# EAGLE board Seeed Studio XIAO nRF52840 v1.1 (EAGLE 9.6.2)
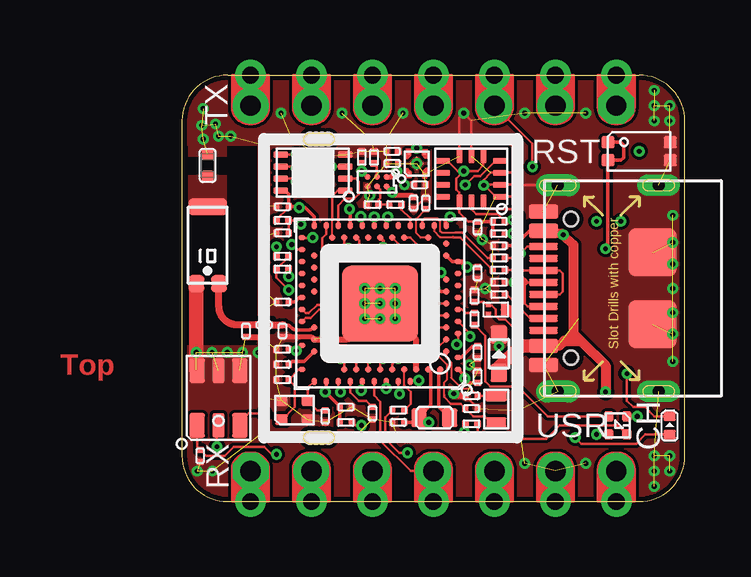
[diagram p0: board, top side]
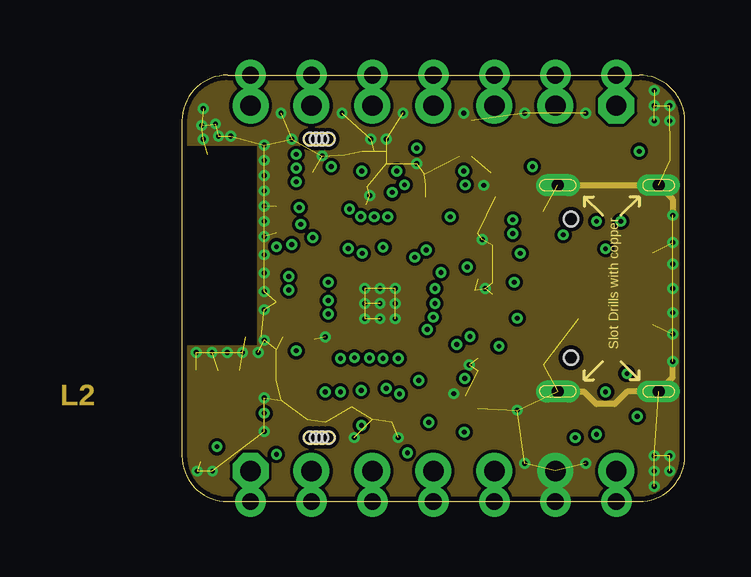
[diagram p1: board, inner layer Route2]
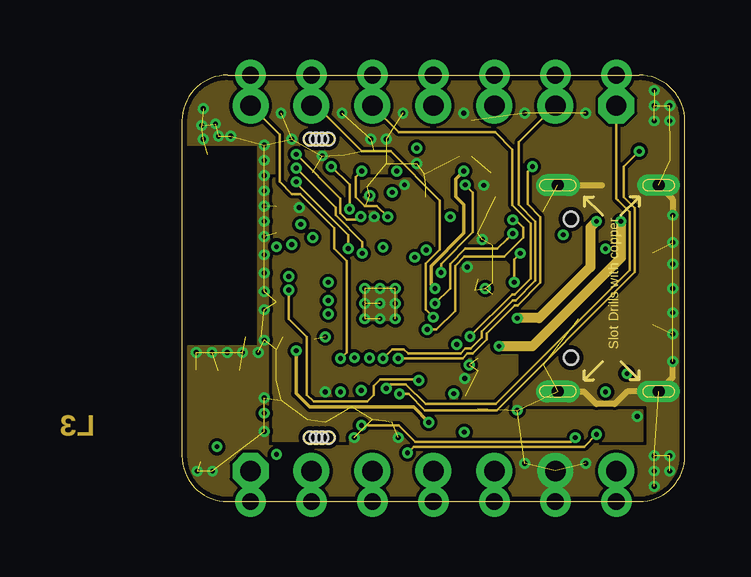
[diagram p2: board, inner layer Route15]
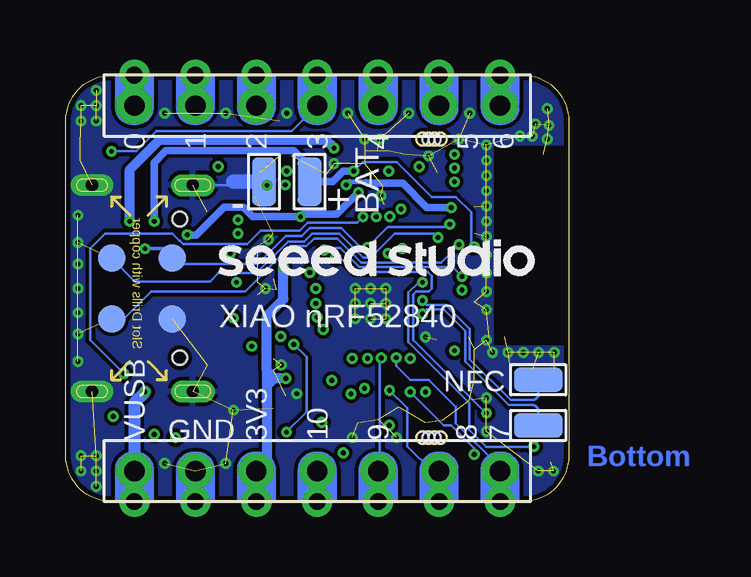
[diagram p3: board, bottom side, seen from below]

Size 20.95 x 17.78 mm. Coordinates in mm from the lower left corner, seen from the top.
Outline: 20.95,1.91 20.95,15.88 arc90 19.05,17.78 1.9,17.78 arc90 0,15.88 0,1.91 arc90 1.9,0 19.05,0 arc90 20.95,1.91
Outline: 5.33,2.92 6.1,2.92 arc-90 6.35,2.67 arc-90 6.1,2.41 5.33,2.41 arc-90 5.08,2.67 arc-90 5.33,2.92
Outline: 5.33,15.37 6.1,15.37 arc-90 6.35,15.11 arc-90 6.1,14.86 5.33,14.86 arc-90 5.08,15.11 arc-90 5.33,15.37
Copper layers (1+2*15+16): Top 0.035mm / dielectric 0.2mm / Route2 0.0175mm / dielectric 0.7mm / Route15 0.0175mm / dielectric 0.2mm / Bottom 0.035mm
Design rules "SeeedStudio_2layer_DRU_no_angle_20140221 *": minimum track width 3.5mil, minimum drill 0.2mm, track to track 3.5mil, track to pad 3.5mil, pad to pad 3.5mil, via to via 3.5mil, smd to smd 0mil, copper to edge 8mil, drill to drill 8mil, minimum pad ring 0.125mm, minimum via ring 0.125mm, stop-mask expansion 1mil, vias tented up to drill 25mil, thermal gap 6mil
Net classes: 0 default: width 0.089 mm, drill 0.2 mm, clearance 0.102 mm
Holes 0.51 mm at 5.33,2.67 6.1,2.67 5.33,15.11 6.1,15.11 5.59,2.67 5.84,2.67 5.59,15.11 5.84,15.11
tRestrict: area 3.1,7.1 to 3.8,7.6; area 5.1,5.1 to 11.4,11.4; area 10.5,12.2 to 13.6,14.7; area 14.5,6.1 to 16,6.2; area 14.5,11.6 to 16,11.7; area 6.5,14.1 to 7.1,14.2
bRestrict: area 23.9,7.9 to 26.9,10.4

## Footprints (pad centres in the part's own frame; a part is rotated, then mirrored left to right if it is on the bottom)
ANT-SMD3P-3.2X1.6X1.04MM = smd 0.65 x 0.7: 1 -0.47,1.6; 2 0.47,1.6 | smd 1.6 x 0.7: 3 0,-1.6
TP-80X40MIL = smd 2.032 x 1.016: 1 0,0
C0201 = smd 0.279 x 0.318: 1 -0.254,0; 2 0.254,0
C0402 = smd 0.445 x 0.508: 1 -0.445,0; 2 0.445,0
L0201 = smd 0.279 x 0.318: 1 -0.254,0; 2 0.254,0
LED-0402 = smd 0.385 x 0.508: + -0.383,0; - 0.383,0
SOD-523 = smd 0.762 x 0.7: + 0.8,0; - -0.8,0
H7-HALF-HOLE-2.54 = drill 0.85 pad 1.5 octagon: 1 0,7.62 | drill 0.85 pad 1.5: 2 0,5.08; 3 0,2.54; 4 0,0; 5 0,-2.54; 6 0,-5.08; 7 0,-7.62 | drill 0.7 pad 1.27: 13 -1.27,7.62; 14 -1.27,5.08; 15 -1.27,2.54; 16 -1.27,0; 17 -1.27,-2.54; 18 -1.27,-5.08; 19 -1.27,-7.62
SW4-SMD-2.8-2.6X1.6X0.53MM = smd 0.55 x 0.5: 1 -1.3,0.375; 2 1.3,0.375; 3 -1.3,-0.375; 4 1.3,-0.375
L0603 = smd 0.635 x 0.762: 1 -0.635,0; 2 0.635,0
MIC6P-3.5X2.65X0.94MM = smd 0.635 x 1.016: 1 0.889,1.143; 3 -0.889,1.143; 4 -0.889,-1.143; 6 0.889,-1.143 | smd 0.508 x 1.016: 2 0,1.143; 5 0,-1.143
PMOS_1.0*0.6*0.35MM = smd 0.5 x 0.25: 1 0,0.325 | smd 0.15 x 0.25: 2 -0.175,-0.325; 3 0.175,-0.325
R0201 = smd 0.279 x 0.318: 1 -0.254,0; 2 0.254,0
4P1010 = smd 0.4 x 0.4: + 0.375,0.375; B- -0.375,0.375; G- -0.375,-0.375; R- 0.375,-0.375
TP-D45MIL = smd 1.143 x 1.143: T 0,0
AQFN50P700X700X85_HS-74N = smd 0.225 x 0.3: A8 -1.25,3.25; A10 -0.75,3.25; A12 -0.25,3.25; A14 0.25,3.25; A16 0.75,3.25; A18 1.25,3.25; A20 1.75,3.25; A22 2.25,3.25; A23 2.75,3.25; AD2 -2.75,-3.25; AD4 -2.25,-3.25; AD6 -1.75,-3.25; AD8 -1.25,-3.25; AD10 -0.75,-3.25; AD12 -0.25,-3.25; AD14 0.25,-3.25; AD16 0.75,-3.25; AD18 1.25,-3.25; AD20 1.75,-3.25; AD22 2.25,-3.25; AD23 2.75,-3.25 | smd 0.3 x 0.225: AA24 3.25,-2.25; AC24 3.25,-2.75; B1 -3.25,2.75; B24 3.25,2.75; C1 -3.25,2.25; E24 3.25,1.75; G1 -3.25,1.25; J1 -3.25,0.75; J24 3.25,0.75; L1 -3.25,0.25; L24 3.25,0.25; N1 -3.25,-0.25; N24 3.25,-0.25; R1 -3.25,-0.75; R24 3.25,-0.75; U1 -3.25,-1.25; U24 3.25,-1.25; W1 -3.25,-1.75; W24 3.25,-1.75 | smd 0.275 x 0.275: AB2 -2.75,-2.5; AC5 -2,-2.75; AC9 -1,-2.75; AC11 -0.5,-2.75; AC13 0,-2.75; AC15 0.5,-2.75; AC17 1,-2.75; AC19 1.5,-2.75; AC21 2,-2.75; B3 -2.5,2.75; B5 -2,2.75; B7 -1.5,2.75; B9 -1,2.75; B11 -0.5,2.75; B13 0,2.75; B15 0.5,2.75; B17 1,2.75; B19 1.5,2.75; D2 -2.75,2; D23 2.75,2; F2 -2.75,1.5; F23 2.75,1.5; H2 -2.75,1; H23 2.75,1; K2 -2.75,0.5; M2 -2.75,0; P2 -2.75,-0.5; P23 2.75,-0.5; T2 -2.75,-1; T23 2.75,-1; V23 2.75,-1.5; Y2 -2.75,-2; Y23 2.75,-2 | smd 3.175 x 3.175: G74 0,0
BQ25101_DSBGA_6_BQ25101 = smd 0.254 x 0.254: A1 -0.2,0.4; A2 0.2,0.4; B1 -0.2,0; B2 0.2,0; C1 -0.2,-0.4; C2 0.2,-0.4
LGA14-0.5-2.5X3X0.86MM = smd 0.6 x 0.25: 1 -1.2,0.75; 2 -1.2,0.25; 3 -1.2,-0.25; 4 -1.2,-0.75; 8 1.2,-0.75; 9 1.2,-0.25; 10 1.2,0.25; 11 1.2,0.75 | smd 0.25 x 0.6: 5 -0.5,-0.95; 6 0,-0.95; 7 0.5,-0.95; 12 0.5,0.95; 13 0,0.95; 14 -0.5,0.95
X2SON-4 = smd 0.152 x 0.152: 1 -0.445,0.318; 2 -0.445,-0.318; 3 0.445,-0.318; 4 0.445,0.318 | smd 0.45 x 0.45 rotated 45: T 0,0
USON2X3_8 = smd 0.6 x 0.26: 1 -1.35,0.75; 2 -1.35,0.25; 3 -1.35,-0.25; 4 -1.35,-0.75; 5 1.35,-0.75; 6 1.35,-0.25; 7 1.35,0.25; 8 1.35,0.75 | smd 0.35 x 1.6: PAD 0,0
USB2.0-TYPE-C = smd 1.2 x 0.6: A1_B12 0.05,3.2; A4_B9 0.05,2.4; B1_A12 0.05,-3.2; B4_A9 0.05,-2.4 | smd 1.2 x 0.3: A5 0.05,1.25; A6 0.05,0.25; A7 0.05,-0.25; A8 0.05,-1.25; B5 0.05,-1.75; B6 0.05,-0.75; B7 0.05,0.75; B8 0.05,1.75 | drill 0.508 pad 0.889 long: S1 -4.75,4.3; S2 -4.75,-4.3 | drill 0.508 pad 0.914 long: S3 -0.55,4.3; S4 -0.55,-4.3 | smd 2 x 2: S5 -4.5,1.5; S6 -4.5,-1.5 | hole 0.6: -1.1,-2.89; -1.1,2.89
X2-SMD-L1.6X1.0X0.5MM = smd 0.45 x 0.85: 1 -0.55,0 | smd 0.45 x 0.9: 2 0.55,0
4P1612 = smd 0.55 x 0.45: 1 -0.55,-0.4; 2 0.55,-0.4; 3 0.55,0.4; 4 -0.55,0.4

## Placement (x,y rotation side)
ANT1  [ANT-SMD3P-3.2X1.6X1.04MM]  1.07,10.69 180 top
BAT  [TP-80X40MIL]  10.79,13.34 90 bottom
C1  100nF  [C0201]  12.32,11.43 90 top
C2  10pF  [C0201]  12.06,4.41 0 top
C3  2.2uF  [C0201]  9.91,13.21 180 top
C4  2.2uF  [C0201]  8.76,14.61 180 top
C5  100nF  [C0201]  4.19,11.2 180 top
C6  2.2uF  [C0201]  12.32,9.53 90 top
C7  10pF  [C0201]  12.06,3.87 180 top
C8  100nF  [C0201]  0.76,1.91 90 top
C9  2.2uF  [C0201]  13.21,10.67 0 top
C10  1nF  [C0402]  1.07,14.02 90 top
C22  2.2uF  [C0201]  10.16,12.45 270 top
C24  100nF  [C0201]  12.32,6.22 90 top
C25  2.2uF  [C0201]  9.65,12.45 90 top
C29  2.2uF  [C0201]  4.19,12.29 0 top
C30  2.2uF  [C0201]  8.76,14.1 180 top
C31  820pF  [C0201]  4.19,8.32 180 top
C32  15pF  [C0201]  5.97,3.56 270 top
C33  15pF  [C0201]  4.19,5.08 180 top
C34  100nF  [C0201]  4.19,6.35 180 top
C35  100pF  [C0201]  4.19,5.72 180 top
C36  0.8pF  [C0201]  4.19,7.11 90 top
C37  0.5pF  [C0201]  2.67,7.11 90 top
C38  4.7nH  [L0201]  3.43,7.37 180 top
C39  2.2uF  [C0201]  6.83,3.94 0 top
C40  DNP  [C0201]  7.94,3.68 270 top
C41  2.2uF  [C0201]  12.32,5.21 270 top
C42  2.2uF  [C0201]  9.02,3.3 180 top
CHG  RED  [LED-0402]  20.32,3.18 90 top
D1  [SOD-523]  13.21,6.16 270 top
GND  GND  [TP-80X40MIL]  12.7,13.34 270 bottom
J1  DNP  [H7-HALF-HOLE-2.54]  10.48,1.27 90 top
J2  DNP  [H7-HALF-HOLE-2.54]  10.48,16.51 270 top
K1  [SW4-SMD-2.8-2.6X1.6X0.53MM]  19.05,14.61 0 top
L3  10uH  [L0603]  10.52,3.49 180 top
MIC1  MSM261D3526H1CPM  [MIC6P-3.5X2.65X0.94MM]  1.52,4.32 180 top
NFC1  [TP-80X40MIL]  1.27,5.08 0 bottom
NFC2  [TP-80X40MIL]  1.27,3.18 0 bottom
Q1  PMOS_1.00.6*0.35MM  [PMOS_1.0*0.6*0.35MM]  13.08,8 270 top
R1  5.1k  [R0201]  13.21,8.64 180 top
R2  5.1k  [R0201]  13.21,9.14 0 top
R3  2.2k  [R0201]  12.19,7.61 90 top
R4  10k  [R0201]  9.02,3.81 0 top
R5  2.2k  [R0201]  6.83,3.3 0 top
R7  2.2k  [R0201]  12.06,3.24 180 top
R8  DNP  [R0201]  7.49,14.35 90 top
R9  100k  [R0201]  12.19,8.57 270 top
R10  33R  [R0201]  13.21,9.65 180 top
R11  33R  [R0201]  13.21,10.16 180 top
R12  2.7k  [R0201]  8.89,12.38 0 top
R13  10k  [R0201]  4.19,11.72 0 top
R14  10k  [R0201]  13.21,11.68 0 top
R15  10k  [R0201]  13.21,11.18 0 top
R16  1M_1%  [R0201]  4.19,10.22 0 top
R17  510k_1%  [R0201]  4.19,9.69 0 top
R18  2.7k  [R0201]  7.94,12.38 180 top
R20  10k  [R0201]  8,14.35 90 top
RGB6  RGB  [4P1010]  18.16,3.18 0 top
TP1  [TP-D45MIL]  16.51,7.62 0 bottom
TP2  [TP-D45MIL]  16.51,10.16 0 bottom
TP3  [TP-D45MIL]  19.05,7.62 0 bottom
TP5  [TP-D45MIL]  19.05,10.16 0 bottom
U1  [AQFN50P700X700X85_HS-74N]  8.26,8.26 180 top
U2  BQ25100  [BQ25101_DSBGA_6_BQ25101]  8.13,13.34 270 top
U3  LSM6DS3TR-C  [LGA14-0.5-2.5X3X0.86MM]  12.06,13.46 180 top
U6  3.3V  [X2SON-4]  9.78,14.1 90 top
U7  DNP  [USON2X3_8]  5.46,13.72 180 top
U$14  [LOGO-SEEED-NEW-1_3X13MM]  14.61,9.4 0 bottom
USB1  [USB2.0-TYPE-C]  15.11,8.89 180 top
X1  32.768KHz  [X2-SMD-L1.6X1.0X0.5MM]  13.09,3.85 90 top
X2  32MHz  [4P1612]  4.7,3.81 0 top

## Library data of the parts
ANT1 = Antenna_rfeca3216060a1t
BAT D1 GND NFC1 NFC2 X1 = Discrete-new
C1-C10 C22 C24 C25 C29-C42 L3 R1-R5 R7-R18 R20 U6 = GroveX
CHG = Discrete-small
J1 J2 = Connector-new
K1 MIC1 U1 U3 = Making
Q1 = PMOS_1006
RGB6 = LoRaPhone
TP1-TP3 TP5 = Discrete-new; PARTNO: DNP
U2 = Seeed XIAO BLE
U7 = USB2.0-TYPE-C
U$14 = logo
USB1 = USB C
X2 = G2

## Nets
3V3: C3.2 C6.2 C29.2 C39.1 C41.2 J1.5 J1.17 R5.1 R13.1 RGB6.+ U1.A22 U1.AD14 U1.AD23 U1.B1 U1.W1 U1.Y2 U6.1 U7.8
6D_INT1: U1.T2 U3.4
6D_PWR: C1.2 R14.1 R15.1 U1.P2 U3.5 U3.8 U3.12
/CE: R20.1 U2.B1
DEC4-6: C34.1 C42.1 L3.2 U1.B5 U1.E24
GND: ANT1.2 C1.1 C2.1 C3.1 C4.2 C5.2 C6.1 C7.1 C8.1 C9.1 C10.2 C22.1 C24.1 C25.1 C29.1 C30.2 C31.2 C32.2 C33.2 C34.2 C35.2 C36.1 C37.1 C39.2 C40.2 C41.1 C42.2 GND.1 J1.6 J1.18 K1.2 K1.4 MIC1.4 MIC1.5 MIC1.6 R1.2 R2.1 R8.2 R9.1 R18.2 R20.2 TP1.T U1.B7 U1.F23 U1.G74 U2.C2 U3.1 U3.2 U3.3 U3.6 U3.7 U6.2 U6.T U7.4 U7.PAD USB1.A1_B12 USB1.B1_A12 USB1.S1 USB1.S2 USB1.S3 USB1.S4 USB1.S5 USB1.S6 X2.2 X2.4
INTERNAL_I2C_SCL: R14.2 U1.H2 U3.13
INTERNAL_I2C_SDA: R15.2 U1.M2 U3.14
N$1: R1.1 USB1.A5
N$2: R2.2 USB1.B5
N$3: C2.2 U1.D2 X1.2
N$4: C7.2 U1.F2 X1.1
N$5: R7.1 RGB6.R-
N$6: R4.1 RGB6.G-
N$7: R10.2 U1.AD4
N$8: R11.2 U1.AD6
N$9: R3.1 RGB6.B-
N$10: CHG.+ R5.2
N$12: ANT1.3 C10.1
N$20: R12.1 R18.1 U2.B2
N$23: C22.2 U1.AC5
N$24: C24.2 U1.C1
N$25: C31.1 U1.N24
N$26: C33.1 U1.B24 X2.1
N$27: C32.1 U1.A23 X2.3
N$28: C35.1 U1.D23
N$30: C36.2 C38.1 U1.H23
N$31: ANT1.1 C37.2 C38.2
N$32: C40.1 U1.A18
N$35: L3.1 U1.B3
P0.02_AIN0_LOW_A0_D0: J2.1 J2.13 U1.A12
P0.03_AIN1_LOW_A1_D1: J2.2 J2.14 U1.B13
P0.04_AIN2_A4_D4: J2.5 J2.17 U1.J1
P0.05_AIN3_A5_D5: J2.6 J2.18 U1.K2
P0.06_USER_BLUE: R3.2 U1.L1
P0.09/NFC1: NFC1.1 U1.L24
P0.10/NFC2: NFC2.1 U1.J24
P0.13_HICHG: R12.2 U1.AD8
P0.14_!READ_BAT: R17.2 U1.AC9
P0.16_PDM_DATA: MIC1.3 U1.AC11
P0.17_!CHG: CHG.- R8.1 U1.AD12 U2.C1
P0.20_QSPI_SIO_0: U1.AD16 U7.5
P0.21_QSPI_SCK: U1.AC17 U7.6
P0.22_QSPI_SIO_2: U1.AD18 U7.3
P0.23_QSPI_SIO_3: U1.AC19 U7.7
P0.24_QSPI_SIO_1: U1.AD20 U7.2
P0.25_QSPI_CSN: U1.AC21 U7.1
P0.26_USER_RED: R7.2 U1.G1
P0.28_AIN4_LOW_A2_D2: J2.3 J2.15 U1.B11
P0.29_AIN5_LOW_A3_D3: J2.4 J2.16 U1.A10
P0.30_USER_GREEN: R4.2 U1.B9
P0.31_AIN7_BAT: R16.2 R17.1 U1.A8
P1.00_PDM_CLK: MIC1.2 U1.AD22
P1.10_MIC_PWR: C8.2 MIC1.1 U1.A20
P1.11_TX_D6: J2.7 J2.19 U1.B19
P1.12_RX_D7: J1.1 J1.13 U1.B17
P1.13_SCK_D8: J1.2 J1.14 U1.A16
P1.14_MISO_D9: J1.3 J1.15 U1.B15
P1.15_MOSI_D10: J1.4 J1.16 U1.A14
PWR_LED: U1.R24
RESET: C5.1 K1.1 K1.3 R13.2 TP2.T U1.AC13
SWDCLK: TP3.T U1.AA24
SWDIO: TP5.T U1.AC24
USB_D+: R11.1 USB1.A6 USB1.B6
USB_D-: R10.1 USB1.A7 USB1.B7
VBAT: BAT.1 C30.1 Q1.1 R16.1 U2.A1
VBUS: C9.2 C25.2 D1.+ J1.7 J1.19 Q1.2 R9.2 U1.AD2 U2.A2 USB1.A4_B9 USB1.B4_A9
VIN: C4.1 D1.- Q1.3 U6.3 U6.4

## Tracks (layer width: path | path; a pad name or v marks a point on that pad's centre or on a via)
3V3  (via drill 0.2 pad 0.45)
  Top 0.102: RGB6.+ | R13.1 3.94,11.76 4.45,12.27 C29.2
  Top 0.152: U1.A22 6,4.61 v5.97,4.57 6.58,3.96 C39.1 R5.1 | U1.Y2 11.26,10.01 U1.W1 | U1.AD23 5.5,11.89 5.14,12.26 v4.89,12.26 4.85,12.29 C29.2 4.45,12.83 4.31,12.97 U7.8 | U1.AD14 v8.01,11.87 v8.01,11.88 | C41.2 11.96,4.95 v11.79,5.13 11.79,5.22 U1.B1 | RGB6.+ v18.97,3.56
  Top 0.203: C6.2 v11.89,9.78 11.66,10.01 U1.W1
  Route15 0.203: J1.17 J1.5
  Bottom 0.203: v9.27,13.21 9.13,13.34 8.46,13.34 8.38,13.27
  Bottom 0.305: v4.89,12.26 5.91,12.26 6.92,13.27 8.38,13.27
  Bottom 0.406: v11.79,5.13 12.24,5.13 | 12.24,5.13 12.57,5.46 | v11.89,9.78 11.89,8.43 12.57,7.75 12.57,5.46 | 12.57,5.46 12.57,4.83 | 12.24,5.13 12.27,5.13 12.57,4.83 | 12.57,4.83 12.57,1.71 J1.5
  pour Top (isolate 0.127, rank 2, no thermals): 9.4,13.84 9.78,13.46 9.78,13.08 9.72,13.02 9.08,13.02 9.08,13.27 9.33,13.53 9.33,13.84
  pour Route15 (isolate 0.127, no thermals): 3.81,13.46 10.03,13.46 13.97,9.53 13.97,3.81 19.18,3.81 19.18,2.54 3.81,2.54
6D_INT1  (via drill 0.2 pad 0.45)
  Top 0.102: U1.T2 11.01,9.34 v10.79,9.55 | U3.4 13.07,14.21 12.43,13.58 12.18,13.58 v11.81,13.21
  Route15 0.102: v10.79,9.55 10.79,9.91 12.12,11.24 12.12,12.89 v11.81,13.21
6D_PWR  (via drill 0.2 pad 0.45)
  Top 0.102: U3.5 12.56,14.03 12.32,13.78 v11.75,13.78 | C1.2 11.94,11.68 11.56,12.06 U3.12 11.56,12.88 11.43,13.02 11.43,13.46 v11.75,13.78 | U3.8 11.06,14.21 11.49,13.78 v11.75,13.78
  Top 0.152: C1.2 R14.1 R15.1 | U1.P2 10.8,8.76 10.67,8.89 v10.54,8.89
  Route15 0.152: v10.54,8.89 10.39,9.04 10.39,9.83 11.75,11.19 11.75,12.38 11.41,12.72 11.41,13.44 v11.75,13.78
/CE
  Top 0.102: U2.B1 8.13,13.97 R20.1
DEC4-6  (via drill 0.2 pad 0.45)
  Top 0.152: U1.B5 10.37,5.39 10.37,4.02 9.88,3.53 L3.2 | C34.1 4.7,6.35 v4.76,6.29 4.98,6.51 U1.E24 | C42.1 9.69,3.3 L3.2 | v10.29,3.3 10.03,3.3 9.88,3.45 L3.2
  Route15 0.152: v4.76,6.29 4.76,4.51 5.33,3.94 9.65,3.94 v10.29,3.3
GND  (via drill 0.2 pad 0.45)  (118 unrouted)
  Top 0.102: C25.1 C22.1 | C7.1 12.32,3.91 11.82,4.41 C2.1 | U3.7 11.56,16.01 v11.75,16.19 12.06,15.88 U3.6 | USB1.S4 13.99,13.19 13.97,13.21 | 13.97,13.21 U3.2 12.6,13.21 12.59,13.2 | 13.97,13.21 13.97,12.83 13.86,12.71 U3.1 13.08,12.71 12.59,13.2 | 13.97,13.21 | 13.97,13.21 13.97,13.22 13.97,13.59 13.85,13.71 U3.3 12.88,13.72 12.57,13.41 v12.57,13.18 12.59,13.2
  Top 0.203: U1.F23 5.4,6.86 C36.1
  Top 0.254: v3.43,6.73 3.3,6.86 C37.1 | C2.1 11.42,4.41 v11.33,4.5 | U1.F23 6.76,6.76 arc90 v7.62,7.62 | U1.B7 9.76,6.76 U1.G74
  Top 0.61: ANT1.2 0.6,5.49 MIC1.6
  Route2 0.254: USB1.S4 USB1.S2 20.45,12.61 v20.45,11.94 | USB1.S3 16.75,4.59 17.27,4.06 18.03,4.06 18.56,4.59 USB1.S1 20.45,5.17 v20.45,5.84
  Route15 0.203: J1.18 J1.6
  Route15 0.254: USB1.S2 20.45,12.61 v20.45,11.94 | v20.45,5.84 20.45,5.17 USB1.S1 18.56,4.59 18.03,4.06 17.27,4.06 16.75,4.59 USB1.S3 | USB1.S4 17.51,13.19
  Bottom 0.102: USB1.S4 14.12,13.19 13.97,13.34
  Bottom 0.61: 13.97,13.34 GND.1
  other vias: 3.43,14.86 3.43,14.22 3.43,13.59 3.43,12.95 3.43,12.32 3.43,11.68 3.43,11.05 3.43,10.29 3.43,9.53 3.43,8.76 3.43,8 3.17,6.22 9.21,16.19 20.45,10.79 20.45,9.91 20.45,6.99 20.45,7.87 0.63,1.27 20.32,1.27 2.53,6.22 0.6,6.22 19.69,15.88 19.69,16.51 14.29,16.19 16.83,16.19 6.67,16.19 4.13,16.19 14.29,1.59 16.83,1.59 4.57,15.11 3.43,4.32 3.43,2.92 9.78,14.1 12.64,8.89 7.82,12.76 12.51,10.92 5.84,14.41 11.98,5.7 8.26,8.26 7.62,8.26 8.89,8.26 8.89,8.89 8.26,8.89 7.62,8.89 8.26,7.62 8.89,7.62 7.87,15.11 8.51,15.11 20.32,1.91 20.45,8.89 20.32,15.88 13.97,3.81 5.97,6.86 7.18,2.67 9.02,2.67 0.89,15.11 1.52,15.24 2.03,15.24 0.83,15.68 0.89,16.38 1.4,15.75 1.26,6.22 1.89,6.22 1.27,1.27 20.32,16.51 19.69,17.15 19.69,1.27 19.69,1.91 19.69,0.63
  pour Route2 (isolate 0.127, no thermals): 20.95,17.53 20.95,0.25 -1.14,0.25 -1.14,1.68 0,1.68 0,6.48 3.17,6.48 3.17,14.88 0.03,14.88 0.03,17.53
  pour Top (isolate 0.127, rank 6, no thermals): 20.95,17.53 20.95,0.25 -0.56,0.25 -0.56,1.68 0,1.68 0,6.48 3.17,6.48 3.17,14.88 0.03,14.88 0.03,17.53
  pour Bottom (isolate 0.152, rank 6): 20.95,17.53 20.95,0.25 -0.86,0.25 -0.86,1.68 0,1.68 0,6.48 3.17,6.48 3.17,14.88 0.03,14.88 0.03,17.53
  pour Route15 (isolate 0.127, rank 6, no thermals): 20.95,17.53 20.95,0.25 -0.28,0.25 -0.28,1.68 0,1.68 0,6.48 3.17,6.48 3.17,14.88 0.03,14.88 0.03,17.53
  pour Top (no thermals): 0.28,15.32 1.85,15.32 1.85,14.38 0.28,14.38
INTERNAL_I2C_SCL  (via drill 0.2 pad 0.45)
  Top 0.102: v13.78,11.75 13.72,11.68 R14.2 13.15,12 12.26,12 12.06,12.19 U3.13 | v10.22,7.18 10.3,7.26 U1.H2
  Route15 0.102: v13.78,11.75 13.91,11.75 14.22,11.43 14.22,11.01 13.43,10.21 11.77,10.21 11.38,9.82 11.38,7.95 10.6,7.18 v10.22,7.18
INTERNAL_I2C_SDA  (via drill 0.2 pad 0.45)
  Top 0.102: R15.2 v13.78,11.18 14.16,11.56 14.16,11.94 13.9,12.2 12.7,12.2 12.56,12.33 U3.14 | v10.54,8.26 U1.M2
  Route15 0.102: v13.78,11.18 13.56,10.95 13.15,10.54 11.81,10.54 11.18,9.91 11.18,8.89 v10.54,8.26
N$1
  Top 0.102: USB1.A5 14.52,7.64 13.53,8.64 R1.1
N$2  (via drill 0.2 pad 0.45)
  Top 0.102: USB1.B5 14.39,10.64 v14.1,10.35 | R2.2 v13.84,9.14
  Route15 0.102: v13.84,9.14 13.84,10.1 v14.1,10.35
N$3
  Top 0.089: U1.D2 11.01,6.01 11.22,5.8 11.22,5.16 11.66,4.72 12,4.72 C2.2
  Top 0.102: X1.2 12.33,4.4 C2.2
N$4
  Top 0.089: U1.F2 10.67,6.42 10.67,6.1 11.04,5.72 11.04,5.08 10.92,4.96 10.92,4.45
  Top 0.102: X1.1 12.88,3.3 12.62,3.56 12.13,3.56 C7.2 11.61,4.08 11.21,4.08 10.92,4.36 10.92,4.45
N$5
  Top 0.102: R7.1 12.32,2.79 12.51,2.6 15.18,2.6 15.75,3.18 18.16,3.18 RGB6.R-
N$6  (via drill 0.2 pad 0.45)
  Top 0.102: R4.1 8.47,3.52 8.47,2.61 9.05,2.03 v9.4,2.03 | v17.27,2.8 RGB6.G-
  Route15 0.102: v9.4,2.03 9.65,2.29 16.76,2.29 v17.27,2.79 v17.27,2.8
N$7
  Top 0.089: U1.AD4 10.51,11.28 10.75,11.03 11.29,11.03 11.31,11.01
  Top 0.102: 11.31,11.01 11.6,11.01 R10.2
N$8
  Top 0.089: U1.AD6 10.01,11.68 10.13,11.81 10.62,11.81 10.75,11.68 10.75,11.3 10.84,11.21 11.39,11.21
  Top 0.102: 11.39,11.21 11.69,11.21 12.74,10.16 R11.2
N$9
  Top 0.102: R3.1 12.64,6.91 12.64,5.02 12.85,4.8 14,4.8 15.25,3.55 RGB6.B-
N$10  (via drill 0.2 pad 0.45)
  Top 0.102: CHG.+ 19.3,2.79 18.92,2.41 16.64,2.41 v16.38,2.67 | v7.48,3.18 7.21,3.18 R5.2
  Route15 0.102: v16.38,2.67 16.2,2.49 9.73,2.49 9.04,3.18 v7.48,3.18
N$12
  pour Top (no thermals): 0.28,13.61 1.85,13.61 1.85,12.32 0.28,12.32
N$20
  Top 0.102: R12.1 R18.1 8.19,12.59 8.26,12.65 8.26,13.01 U2.B2
N$23
  Top 0.089: U1.AC5 9.95,11.01 9.75,11.2 9.75,11.79 C22.2
N$24
  Top 0.152: U1.C1 11.63,6.01 12.1,6.48 C24.2
N$25
  Top 0.152: U1.N24 4.89,8.51 4.7,8.32 C31.1
N$26
  Top 0.102: U1.B24 4.87,5.51 C33.1 4.7,4.83 4.7,3.94 4.17,3.41 X2.1
N$27
  Top 0.102: U1.A23 5.25,4.75 X2.3 5.65,3.81 C32.1
N$28
  Top 0.127: 4.46,5.7 C35.1
  Top 0.152: U1.D23 5.09,5.84 4.6,5.84 4.46,5.7
N$30
  Top 0.152: U1.H23 5.48,7.26 arc90 5.44,7.21 arc-45 5.26,7.16 4.75,7.16 arc-45 4.57,7.24 4.52,7.29 arc45 4.34,7.37 C36.2
  Top 0.293: C38.1 C36.2
N$31
  Top 0.293: ANT1.1 1.54,8.13 arc90 2.3,7.37 C37.2 C38.2
N$32
  Top 0.102: U1.A18 7.01,4.56 7.37,4.19 7.68,4.19 C40.1
N$35
  Top 0.152: U1.B3 10.69,5.44 10.69,3.95 L3.1
P0.02_AIN0_LOW_A0_D0  (via drill 0.2 pad 0.45)
  Top 0.102: U1.A12 v8.51,4.72 v8.51,4.71
  Route15 0.102: v8.51,4.71 8.69,4.89 9.33,4.89 10.16,4.06 13.08,4.06 18.67,9.65 18.67,12.07 18.16,12.57 18.1,12.64 J2.1
  Route15 0.203: J2.13 J2.1
P0.03_AIN1_LOW_A1_D1  (via drill 0.2 pad 0.45)
  Top 0.102: U1.B13 8.26,5.84 v8.38,5.97
  Route15 0.102: v8.38,5.97 8.76,6.35 9.25,6.35 9.42,6.17 10.16,6.17 10.16,6.18 11.61,6.18 11.81,6.38 12.03,6.38 12.5,6.85 12.5,7.09 13.79,8.38 13.9,8.38 14.73,9.21 14.73,11.68 14.03,12.38 14.03,14.99 J2.2
  Route15 0.203: J2.14 J2.2
P0.04_AIN2_A4_D4  (via drill 0.2 pad 0.45)
  Top 0.102: U1.J1 12,7.01 v12,6.88
  Route15 0.102: v12,6.88 13.75,8.64 13.87,8.64 14.53,9.3 14.53,11.6 13.77,12.36 13.77,14.68 13.05,15.4 9.04,15.4 7.94,16.5 J2.5
  Route15 0.203: J2.17 7.94,16.5
P0.05_AIN3_A5_D5  (via drill 0.2 pad 0.45)
  Top 0.102: U1.K2 10.55,7.76 v10.48,7.68
  Route15 0.102: v10.48,7.68 10.16,8 10.16,9.92 10.75,10.51 10.75,12.56 8.7,14.61 7.49,14.61 5.59,16.51 J2.6
  Route15 0.203: J2.18 J2.6
P0.06_USER_BLUE
  Top 0.102: U1.L1 11.67,8.01 11.81,7.86 R3.2
P0.09/NFC1  (via drill 0.2 pad 0.45)
  Top 0.102: U1.L24 5.15,7.86 5.28,7.86 5.63,8.2 5.92,8.2 v6.1,8.38
  Bottom 0.102: NFC1.1 1.27,4.48 arc90 1.52,4.23 2.42,4.23 4.12,5.93 4.12,7.2 5.12,8.2 5.92,8.2 v6.1,8.38
P0.10/NFC2  (via drill 0.2 pad 0.45)
  Top 0.102: U1.J24 5.15,7.65 5.37,7.65 5.71,8 5.92,8 v6.1,7.82
  Bottom 0.102: NFC2.1 1.27,3.77 arc-90 1.52,4.03 2.5,4.03 4.32,5.84 4.32,7.11 5.21,8 5.92,8 v6.1,7.82
P0.13_HICHG
  Top 0.102: U1.AD8 9.51,11.82 9.14,12.18 R12.2
P0.14_!READ_BAT  (via drill 0.2 pad 0.45)
  Top 0.102: R17.2 v4.45,9.39 v4.45,9.38 | v10.19,10.49 10.03,10.49 9.51,11.01 U1.AC9
  Bottom 0.102: v4.45,9.38 4.83,9.77 8.72,9.77 9.51,10.56 10.11,10.56 v10.19,10.49
P0.16_PDM_DATA  (via drill 0.2 pad 0.45)
  Top 0.102: U1.AC11 9.57,10.19 v9.7,10.19 | MIC1.3 2.41,3.3 2.79,3.68 v3.43,3.68
  Bottom 0.102: v9.7,10.19 9.55,10.19 8.93,9.57 5.88,9.57 5.71,9.4 5.71,8.89 5.84,8.76 6.35,8.76 6.48,8.64 6.48,6.73 v3.43,3.68
P0.17_!CHG  (via drill 0.2 pad 0.45)
  Top 0.102: CHG.- 19.68,3.56 19.3,3.94 18.8,3.94 18.54,4.19 v18.54,5.33
  Top 0.152: U1.AD12 8.51,11.81 v8.57,11.88 | U2.C1 v7.49,13.77 v7.49,13.78 R8.1
  Route15 0.102: v7.49,13.78 7.24,13.53 7.24,12.7 7.62,12.32 8.13,12.32 v8.57,11.88
  Bottom 0.102: v8.57,11.88 8.81,11.63 10.88,11.63 11.21,11.31 12.82,11.31 13.39,10.74 16.07,10.74 16.21,10.88 16.22,10.88 16.51,11.18 19.3,11.18 19.94,10.54 19.94,6.73 v18.54,5.33
P0.20_QSPI_SIO_0  (via drill 0.2 pad 0.45)
  Top 0.102: U7.5 4.75,14.47 v4.76,14.48
  Top 0.152: U1.AD16 7.51,11.84 v7.46,11.89
  Route15 0.102: v7.46,11.89 7.33,11.76 6.87,11.76 6.6,12.03 6.6,12.64 v4.76,14.48
P0.21_QSPI_SCK  (via drill 0.2 pad 0.45)
  Top 0.102: U7.6 4.7,13.97 v4.76,13.91 | U1.AC17 7.38,10.88 7.38,10.49 v7.52,10.35
  Route15 0.102: v7.52,10.35 7.52,10.82 6.4,11.94 6.4,12.27 v4.76,13.91
P0.22_QSPI_SIO_2  (via drill 0.2 pad 0.45)
  Top 0.102: U7.3 v6.23,13.97 v6.22,13.97
  Top 0.152: U1.AD18 7.01,12.17 v6.99,12.19
  Route15 0.102: v6.99,12.19 6.99,13.21 v6.22,13.97
P0.23_QSPI_SIO_3  (via drill 0.2 pad 0.45)
  Top 0.102: U7.7 4.63,13.47 v4.76,13.34 | U1.AC19 6.76,10.73 v6.93,10.55
  Route15 0.102: v6.93,10.55 6.93,11.11 4.76,13.28 v4.76,13.34
P0.24_QSPI_SIO_1
  Top 0.102: U1.AD20 6.51,12.35 6.79,12.64 7.18,12.64 7.37,12.83 7.37,13.34 7.24,13.47 U7.2
P0.25_QSPI_CSN
  Top 0.089: U1.AC21 6.26,11.75
  Top 0.102: 6.26,11.75 6.26,12.73 6.49,12.97 U7.1
P0.26_USER_RED  (via drill 0.2 pad 0.45)
  Top 0.102: U1.G1 11.51,6.6 v11.46,6.55 | R7.2 11.81,2.95 v11.76,2.9
  Bottom 0.102: v11.46,6.55 10.92,6.02 10.92,3.73 v11.76,2.9
P0.28_AIN4_LOW_A2_D2  (via drill 0.2 pad 0.45)
  Top 0.102: U1.B11 8.76,5.71 v9.02,5.97 | J2.3 14.61,14.92 v14.61,13.97
  Route15 0.102: v14.61,13.97 14.4,13.77 14.4,12.39 14.94,11.86 14.94,9.13 13.99,8.18 13.87,8.18 12.7,7.01 12.7,6.76 12.12,6.18 11.9,6.18 11.69,5.97 v9.02,5.97
  Route15 0.203: J2.15 J2.3
P0.29_AIN5_LOW_A3_D3  (via drill 0.2 pad 0.45)
  Top 0.102: U1.A10 9.01,4.55 v9.07,4.48
  Route15 0.102: v9.07,4.48 9.45,4.48 10.12,3.81 13.11,3.81 18.87,9.57 18.87,12.24 18.41,12.7 18.41,13.97 v19.05,14.61
  Route15 0.203: J2.16 J2.4
  Bottom 0.102: v19.05,14.61 18.03,14.61 17.19,15.44 11.53,15.44 10.48,16.5 J2.4
P0.30_USER_GREEN
  Top 0.089: 9.26,4.84 U1.B9
  Top 0.102: R4.2 9.53,4.06 9.53,4.57 9.26,4.84
P0.31_AIN7_BAT  (via drill 0.2 pad 0.45)
  Top 0.102: v9.87,5.06 9.55,5.06 U1.A8 | v4.45,8.83 3.94,9.34 R17.1 4.45,10.2 R16.2
  Route15 0.102: v9.87,5.06 9.83,5.09 8.27,5.09 8,4.83 8,4.45 7.72,4.17 5.49,4.17 5.21,4.45 5.21,6.86 4.45,7.62 v4.45,8.83
P1.00_PDM_CLK  (via drill 0.2 pad 0.45)
  Top 0.102: U1.AD22 6,11.17 5.84,11 5.84,9.4 v6.1,9.14 | v1.46,2.29 1.46,3.11 MIC1.2
  Bottom 0.102: v6.1,9.14 6.26,9.14 6.68,8.72 6.68,6.65 4.14,4.11 4.14,3 3.43,2.29 v1.46,2.29
P1.10_MIC_PWR  (via drill 0.2 pad 0.45)
  Top 0.102: U1.A20 6.51,4.67 v6.6,4.57 | v3.94,1.97 3.75,1.97 3.43,2.29 2.16,2.29 1.78,1.91 1.02,1.91 C8.2 0.63,2.29 MIC1.1
  Bottom 0.102: v6.6,4.57 5.21,3.18 4.97,3.18 4.89,3.18 3.94,2.22 v3.94,1.97
P1.11_TX_D6  (via drill 0.2 pad 0.45)
  Top 0.102: U1.B19 6.76,5.82 v6.6,5.97
  Route15 0.102: v6.6,5.97 6.86,6.22 6.86,10.03 6.35,10.54 6.35,11.41 4.93,12.83 4.58,12.83 4.07,13.34 4.07,15.3 J2.7
  Route15 0.203: J2.19 J2.7
P1.12_RX_D7  (via drill 0.2 pad 0.45)
  Top 0.102: U1.B17 7.26,5.93 v7.19,5.99
  Route15 0.203: J1.13 J1.1
  Bottom 0.102: v7.19,5.99 7.19,5.66 6.6,5.08 5.84,5.08 4.7,3.94 4.7,3.27 2.86,1.43 J1.1
P1.13_SCK_D8  (via drill 0.2 pad 0.45)
  Top 0.102: U1.A16 7.51,4.67 v7.47,4.64
  Route15 0.203: J1.14 J1.2
  Bottom 0.102: v7.47,4.64 6.73,3.9 6.73,2.31 5.7,1.27 J1.2
P1.14_MISO_D9  (via drill 0.2 pad 0.45)
  Top 0.089: U1.B15 7.76,5.93 v7.81,5.99
  Route15 0.203: J1.15 J1.3
  Bottom 0.102: v7.81,5.99 7.87,5.93 7.87,1.33 7.93,1.28 J1.3
P1.15_MOSI_D10
  Top 0.102: U1.A14 8.01,4.42 8.27,4.15 8.27,2.53 9.53,1.27 J1.4
  Route15 0.203: J1.16 J1.4
RESET  (via drill 0.2 pad 0.45)
  Top 0.102: C5.1 R13.2 4.79,11.72 v4.95,11.56
  Top 0.152: U1.AC13 8.38,10.88 v8.38,10.6 | K1.1 18.29,14.98 18.41,14.86 18.41,14.35 18.29,14.23 K1.3 17.75,10.64 v17.65,10.54
  Bottom 0.102: v4.95,11.56 5.05,11.46 7.53,11.46 v8.38,10.6 8.69,10.6 9.49,11.41 10.79,11.41 11.12,11.08 11.78,11.08 12.95,9.91 16.26,9.91 TP2.T
  Bottom 0.152: v17.65,10.54 16.89,10.54 TP2.T
SWDCLK  (via drill 0.2 pad 0.45)
  Top 0.102: U1.AA24 4.79,10.51 v4.57,10.72
  Bottom 0.102: TP3.T 18.54,7.62 17.4,8.76 13.49,8.76 11.6,10.65 10.94,10.65 10.61,10.97 9.63,10.97 8.63,9.97 5.32,9.97 v4.57,10.72
SWDIO  (via drill 0.2 pad 0.45)
  Top 0.102: U1.AC24 5.03,10.98 5.41,10.98 5.43,11 v5.45,11
  Bottom 0.102: TP5.T 18.07,9.18 14.94,9.18 14.6,9.53 13.01,9.53 11.69,10.85 11.02,10.85 10.69,11.18 9.55,11.18 8.55,10.18 8.24,10.18 7.24,11.18 5.62,11.18 v5.45,11
USB_D+
  Top 0.102: R11.1 13.72,10.16 14.24,9.64 USB1.B6 15.75,9.64 15.88,9.51 15.88,8.77 15.75,8.64 USB1.A6
USB_D-
  Top 0.102: USB1.B7 14.4,8.14 14.29,8.26 14.29,9.02 | 14.29,9.02 14.29,9.14 | 14.29,9.14 14.29,9.27 | 14.29,9.27 13.91,9.65 R10.1 | USB1.A7 14.42,9.14 14.29,9.27 | USB1.A7 14.41,9.14 14.29,9.02 | 14.29,9.14 USB1.A7
VBAT  (via drill 0.2 pad 0.45)
  Top 0.203: U2.A1 8.71,13.54 v8.95,13.78 9.02,13.84 C30.1 | v3.94,10.63 v3.94,10.62 R16.1
  Top 0.254: Q1.1 13.61,8
  Top 0.406: v13.97,7.65 13.61,8
  Route15 0.406: v17.27,11.68 17.02,11.43 17.02,9.78 14.88,7.65 v13.97,7.65
  Bottom 0.102: v3.94,10.63 4.06,10.75 4.06,12.07 4.7,12.7 5.71,12.7 7.17,14.16 8.58,14.16 v8.95,13.78
  Bottom 0.305: v8.95,13.78 9.39,13.78 9.84,13.34 BAT.1 10.79,13.97 11.46,14.63 16.78,14.63 17.27,14.14 v17.27,11.68
VBUS  (via drill 0.2 pad 0.45)
  Top 0.102: R9.2 12.57,8.32 12.71,8.18 Q1.2 12.91,8.18 13.08,8 13.08,7.75 13.23,7.6 13.47,7.6 13.97,7.1 13.97,6.63 14.11,6.49
  Top 0.152: C9.2 13.84,10.67 14.46,11.29 14.99,11.29 USB1.B4_A9
  Top 0.203: C25.2 9.59,12.76 8.89,12.76 v8.76,12.89 8.53,13.13 U2.A2 | U1.AD2 11.01,11.7 v11.18,11.88
  Top 0.381: 16.31,10.71 v15.89,11.12 15.84,11.18 15.1,11.18 14.99,11.29
  Top 0.406: 16,6.71 16.61,6.71 | 16.61,6.71 17.65,5.67 v17.65,4.57 | 16.31,7.01 16.61,6.71 | 16.31,7.01 16,6.71 | 16,6.71 15.92,6.71 15.7,6.49 USB1.A4_B9 | 16.31,10.71 16.31,7.01
  Top 0.559: USB1.A4_B9 14.11,6.49 13.21,5.59 D1.+
  Route15 0.203: J1.19 J1.7
  Bottom 0.305: v8.76,12.89 9.67,11.99 11.05,11.99 11.06,11.99 v11.18,11.88 13.16,11.88 13.56,12.28 14.36,12.28 15.51,11.12 v15.89,11.12
  Bottom 0.508: v17.65,4.57 18.1,4.13 18.1,1.28 J1.7
  pour Top (isolate 0.102, no thermals): 14.53,6.73 15.6,6.73 15.6,6.25 14.53,6.25
VIN  (via drill 0.2 pad 0.45)
  Route15 0.406: v18.29,11.68 18.29,10.16 14.61,6.48 v13.21,6.48
  Bottom 0.406: v18.29,11.68 18.29,13.84 17.04,15.09 10.13,15.09 v9.78,14.73
  pour Top (isolate 0.127, no thermals): 12.64,7.87 12.89,7.87 13.53,7.24 13.53,6.35 12.64,6.35
  pour Top (isolate 0.127, rank 3, no thermals): 8.89,14.92 8.89,14.48 9.21,14.48 9.33,14.35 10.29,14.35 10.29,14.92

## Text on the board
Top: Top
Route2: L2
Route15: L3
Bottom: Bottom
tNames: TX | LAYER STACK-UP - ALL DIMENSIONS IN MIL | RST | 50ohm SINGLE ENDED / IMPEDANCE CONTROL +/-10% | 90ohm SINGLE ENDED / IMPEDANCE CONTROL +/-10% | 100ohm SINGLE ENDED / IMPEDANCE CONTROL +/-10% | TRACE WIDTH | TRACE WIDTH / SPACE | TRACE WIDTH / SPACE | LAYER# | COPPER WEIGHT / (OZ) | LAYER 1 - GTL | 1.0 | 11.55 | LAYER 2 - GND | 0.5 | USR | CH | LAYER 3 - POWER | 0.5 | RX | LAYER 4 - GBL | 1.0
bNames: 6 | 5 | 4 | 3 | 2 | 1 | 0 | + | - | XIAO nRF52840 | NFC | 7 | 8 | 9 | 10 | 3V3 | GND | VUSB
tStop: SEEED | MIAO
bTest: GND | RST | CLK | DIO